# EAGLE board Schematics_backup (EAGLE 9.2.2)
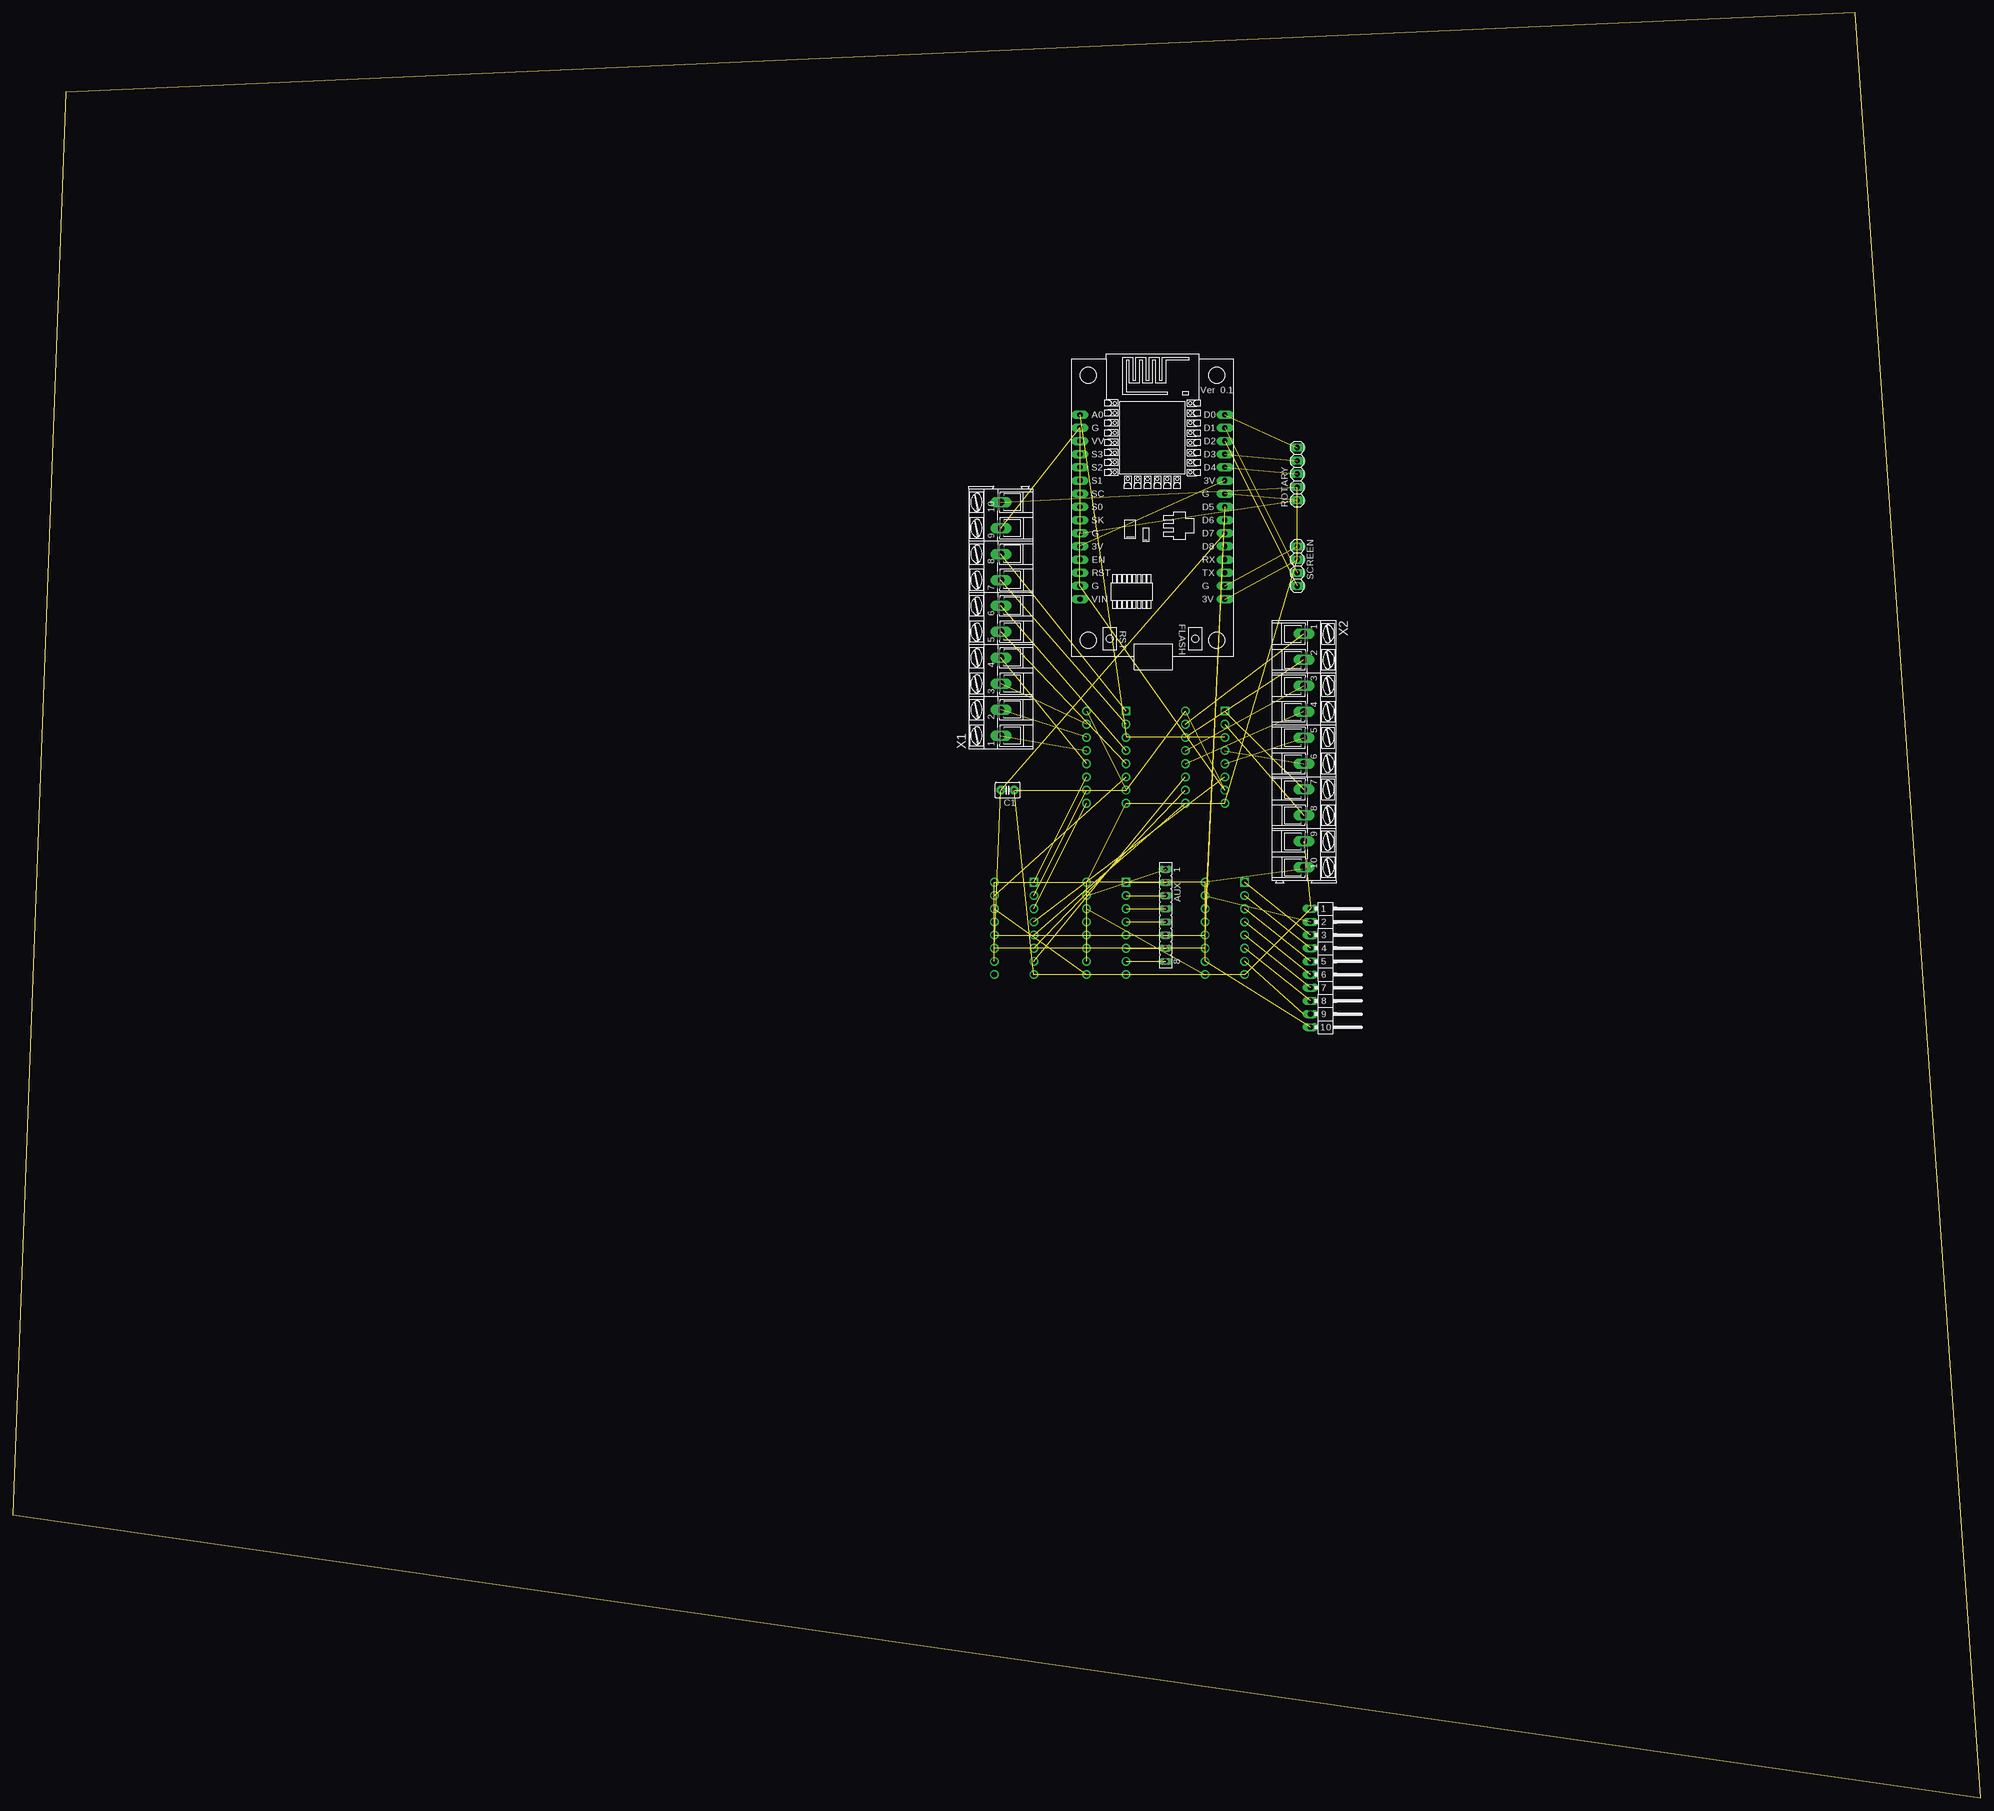
[diagram p0: board, top side]
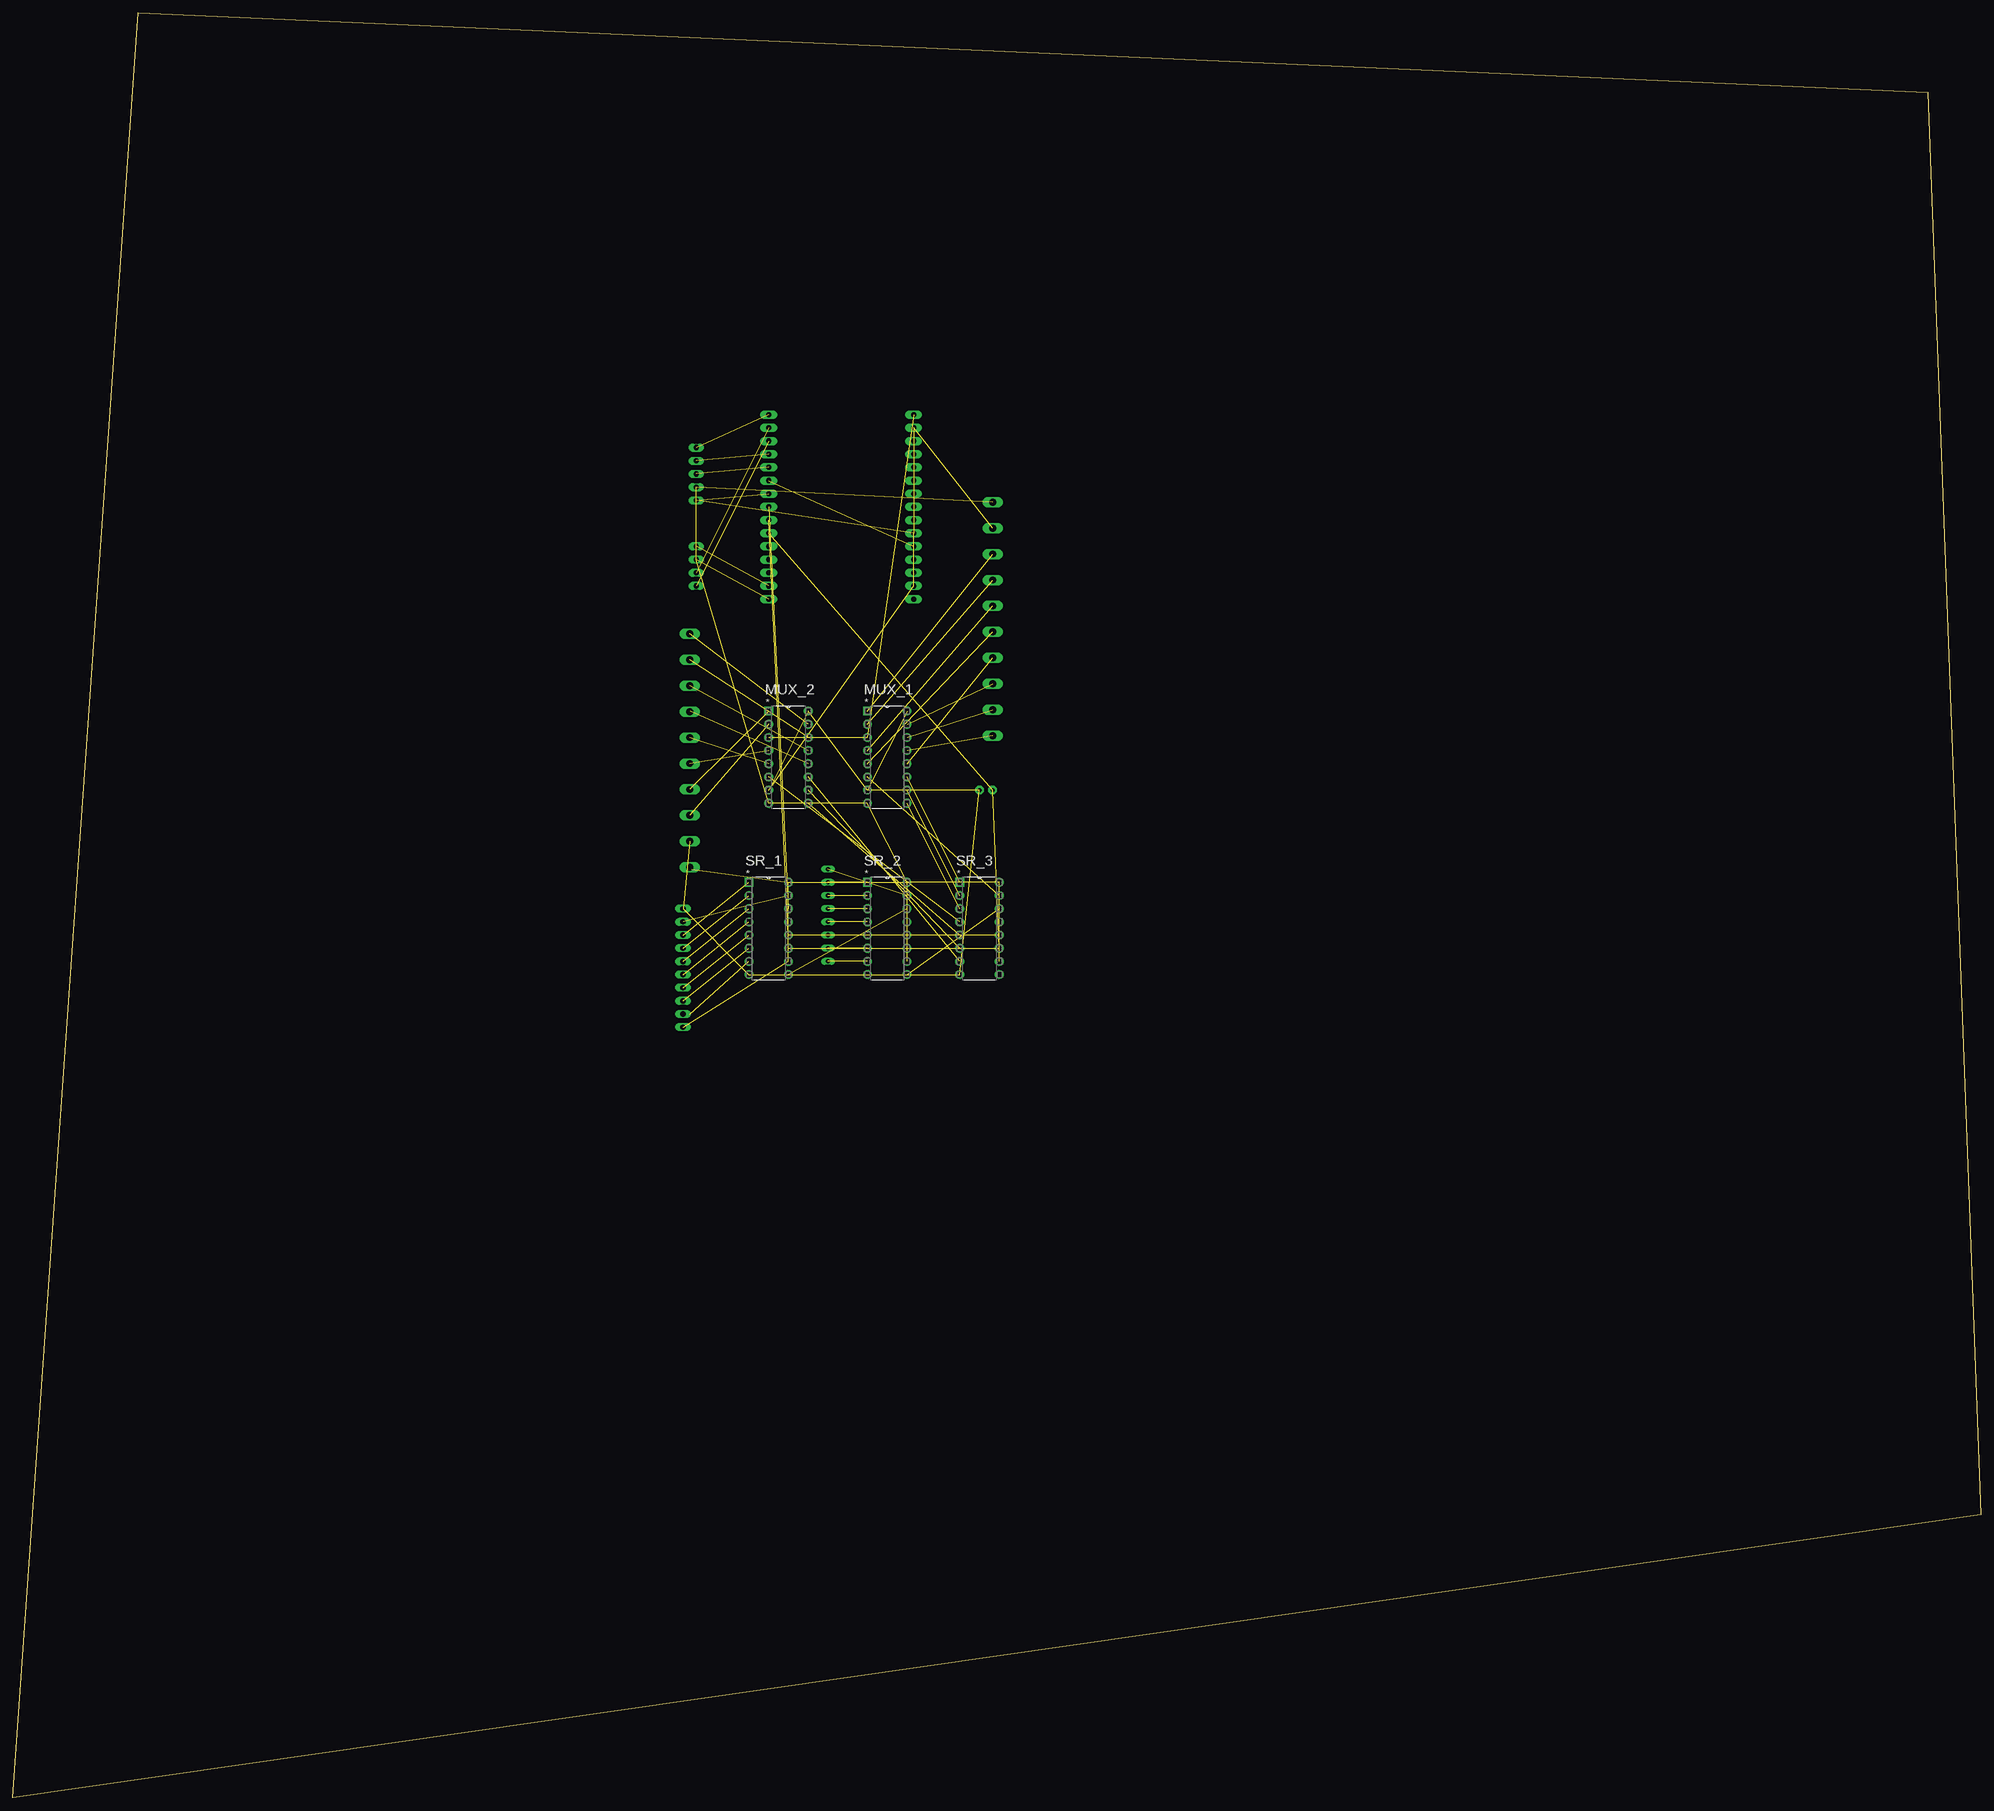
[diagram p1: board, bottom side, seen from below]

Size 379.4 x 344.16 mm. Coordinates in mm from the lower left corner, seen from the top.
Outline: 0,54.61 379.4,0 355.27,344.16 10.16,328.92 0,54.61
Copper layers (1*16): Top 0.035mm / dielectric 1.5mm / Bottom 0.035mm
Design rules "default": minimum track width 6mil, minimum drill 0.35mm, track to track 6mil, track to pad 6mil, pad to pad 6mil, via to via 6mil, smd to smd 6mil, copper to edge 40mil, drill to drill 6mil, minimum pad ring 10mil, minimum via ring 8mil, stop-mask expansion 4mil, vias tented up to drill 0mil, thermal gap 10mil

## Footprints (pad centres in the part's own frame; a part is rotated, then mirrored left to right if it is on the bottom)
FE08 = drill 0.813 long: 1 -8.89,0; 2 -6.35,0; 3 -3.81,0; 4 -1.27,0; 5 1.27,0; 6 3.81,0; 7 6.35,0; 8 8.89,0
C2.5-3 = drill 0.813 pad 1.6 octagon: 1 -1.27,0; 2 1.27,0
DIP254P762X508-16 = drill 1.118 square: 1 -7.62,17.78 | drill 1.118: 2 -7.62,15.24; 3 -7.62,12.7; 4 -7.62,10.16; 5 -7.62,7.62; 6 -7.62,5.08; 7 -7.62,2.54; 8 -7.62,0; 9 0,0; 10 0,2.54; 11 0,5.08; 12 0,7.62; 13 0,10.16; 14 0,12.7; 15 0,15.24; 16 0,17.78
MA10-1W = drill 1.016 long: 1 -11.43,0; 2 -8.89,0; 3 -6.35,0; 4 -3.81,0; 5 -1.27,0; 6 1.27,0; 7 3.81,0; 8 6.35,0; 9 8.89,0; 10 11.43,0
1X05 = drill 1.016 long: 1 -5.08,0; 2 -2.54,0; 3 0,0; 4 2.54,0; 5 5.08,0
1X04 = drill 1.016 long: 1 -3.81,0; 2 -1.27,0; 3 1.27,0; 4 3.81,0
NODEMCU = drill 1 pad 1.676 long: 1 -13.97,17.78; 2 -13.97,15.24; 3 -13.97,12.7; 4 -13.97,10.16; 5 -13.97,7.62; 6 -13.97,5.08; 7 -13.97,2.54; 8 -13.97,0; 9 -13.97,-2.54; 10 -13.97,-5.08; 11 -13.97,-7.62; 12 -13.97,-10.16; 13 -13.97,-12.7; 14 -13.97,-15.24; 15 -13.97,-17.78; 16 13.97,-17.78; 17 13.97,-15.24; 18 13.97,-12.7; 19 13.97,-10.16; 20 13.97,-7.62; 21 13.97,-5.08; 22 13.97,-2.54; 23 13.97,0; 24 13.97,2.54; 25 13.97,5.08; 26 13.97,7.62; 27 13.97,10.16; 28 13.97,12.7; 29 13.97,15.24; 30 13.97,17.78
AK300/10 = drill 1.321 long: 1 -22.504,0; 2 -17.501,0; 3 -12.497,0; 4 -7.493,0; 5 -2.515,0; 6 2.489,0; 7 7.493,0; 8 12.497,0; 9 17.501,0; 10 22.504,0

## Placement (x,y rotation side)
AUX  [FE08]  222.25,170.18 270 top
C1  10µF  [C2.5-3]  191.77,194.31 180 top
MUX_1  CD4051BE  [DIP254P762X508-16]  207.01,191.77 0 bottom
MUX_2  CD4051BE  [DIP254P762X508-16]  226.06,191.77 0 bottom
RELAYS  [MA10-1W]  250.19,160.02 270 top
ROTARY  [1X05]  247.65,255.27 90 top
SCREEN  [1X04]  247.65,237.49 270 top
SR_1  SN74HC595N  [DIP254P762X508-16]  229.87,158.75 0 bottom
SR_2  SN74HC595N  [DIP254P762X508-16]  207.01,158.75 0 bottom
SR_3  SN74HC595N  [DIP254P762X508-16]  189.23,158.75 0 bottom
U$1  NODEMCU  [NODEMCU]  219.71,248.92 0 top
X1  Boutons  [AK300/10]  190.5,227.33 90 top
X2  Potentiometres  [AK300/10]  248.92,201.93 270 top

## Library data of the parts
AUX = con-lsta; OC_FARNELL: unknown; OC_NEWARK: unknown
C1 = capacitor-wima
MUX_1 MUX_2 = CD4051BEE4; MPN: CD4051BE; OC_FARNELL: 2135100; OC_NEWARK: 60K5119; PACKAGE: PDIP-16; SUPPLIER: Texas Instruments
RELAYS = con-lstb; OC_FARNELL: unknown; OC_NEWARK: unknown
ROTARY SCREEN = pinhead
SR_1-SR_3 = 74hc595; MPN: SN74HC595N; OC_FARNELL: 9591664; OC_NEWARK: 60K6845; PACKAGE: PDIP-16; SUPPLIER: Texas Instruments
U$1 = nodemcu
X1 X2 = con-ptr500; OC_FARNELL: unknown; OC_NEWARK: unknown

## Nets
3V: U$1.11 U$1.25
GND: C1.1 MUX_1.7 MUX_1.16 MUX_2.7 MUX_2.16 RELAYS.1 ROTARY.1 SCREEN.1 SR_1.8 SR_2.8 SR_3.8 U$1.2 U$1.10 U$1.14 U$1.17 U$1.24 X1.9 X2.9
N$1: RELAYS.2 SR_1.15
N$2: SR_1.14 U$1.23
N$3: SR_1.12 SR_2.12 SR_3.12 U$1.22
N$4: SR_2.9 SR_3.14
N$5: C1.2 SR_1.11 SR_2.11 SR_3.11 U$1.21
N$6: RELAYS.3 SR_1.1
N$7: RELAYS.4 SR_1.2
N$8: RELAYS.5 SR_1.3
N$9: RELAYS.6 SR_1.4
N$10: RELAYS.7 SR_1.5
N$11: RELAYS.8 SR_1.6
N$12: RELAYS.9 SR_1.7
N$13: MUX_1.13 X1.1
N$14: MUX_1.14 X1.2
N$15: SR_1.9 SR_2.14
N$16: MUX_1.15 X1.3
N$17: MUX_1.12 X1.4
N$18: MUX_1.1 X1.8
N$19: MUX_1.5 X1.5
N$20: MUX_1.2 X1.7
N$21: MUX_1.4 X1.6
N$22: MUX_2.1 X2.7
N$23: MUX_2.2 X2.8
N$24: MUX_1.6 SR_3.15
N$25: MUX_1.11 SR_3.1
N$26: MUX_1.10 SR_3.2
N$27: MUX_1.9 SR_3.3
N$28: MUX_2.6 SR_3.4
N$29: MUX_2.9 SR_3.5
N$30: MUX_2.10 SR_3.6
N$31: MUX_2.11 SR_3.7
N$32: MUX_1.3 MUX_2.3 U$1.1
N$33: MUX_2.4 X2.6
N$34: MUX_2.5 X2.5
N$35: MUX_2.12 X2.4
N$36: MUX_2.15 X2.1
N$37: MUX_2.14 X2.2
N$38: MUX_2.13 X2.3
N$39: AUX.1 SR_2.15
N$40: AUX.2 SR_2.1
N$41: AUX.3 SR_2.2
N$42: AUX.4 SR_2.3
N$43: AUX.5 SR_2.4
N$44: AUX.6 SR_2.5
N$45: AUX.7 SR_2.6
N$46: AUX.8 SR_2.7
N$48: ROTARY.3 U$1.26
N$49: ROTARY.5 U$1.30
N$50: ROTARY.4 U$1.27
N$51: SCREEN.4 U$1.28
N$52: SCREEN.3 U$1.29
VCC: MUX_1.8 MUX_2.8 RELAYS.10 ROTARY.2 SCREEN.2 SR_1.10 SR_1.16 SR_2.10 SR_2.16 SR_3.10 SR_3.16 U$1.16 X1.10 X2.10

## Tracks (layer width: path | path; a pad name or v marks a point on that pad's centre or on a via)
3V  (1 unrouted)
GND  (17 unrouted)
  Bottom 0.152: RELAYS.1 251.46,171.45
N$1  (1 unrouted)
N$2  (1 unrouted)
N$3  (3 unrouted)
N$4  (1 unrouted)
N$5  (4 unrouted)
N$6  (1 unrouted)
N$7  (1 unrouted)
N$8  (1 unrouted)
N$9  (1 unrouted)
N$10  (1 unrouted)
N$11  (1 unrouted)
N$12  (1 unrouted)
  Top 0.152: RELAYS.9 248.92,151.13
N$13  (1 unrouted)
N$14  (1 unrouted)
N$15  (1 unrouted)
N$16  (1 unrouted)
N$17  (1 unrouted)
N$18  (1 unrouted)
N$19  (1 unrouted)
N$20  (1 unrouted)
N$21  (1 unrouted)
N$22  (1 unrouted)
N$23  (1 unrouted)
N$24  (1 unrouted)
N$25  (1 unrouted)
N$26  (1 unrouted)
N$27  (1 unrouted)
N$28  (1 unrouted)
N$29  (1 unrouted)
N$30  (1 unrouted)
N$31  (1 unrouted)
N$32  (2 unrouted)
N$33  (1 unrouted)
N$34  (1 unrouted)
N$35  (1 unrouted)
  Top 0.152: 248.79,209.55 X2.4
N$36  (1 unrouted)
N$37  (1 unrouted)
N$38  (1 unrouted)
N$39  (1 unrouted)
N$40  (1 unrouted)
N$41  (1 unrouted)
N$42  (1 unrouted)
N$43  (1 unrouted)
N$44  (1 unrouted)
N$45  (1 unrouted)
N$46  (1 unrouted)
N$48  (1 unrouted)
N$49  (1 unrouted)
N$50  (1 unrouted)
N$51  (1 unrouted)
N$52  (1 unrouted)
VCC  (13 unrouted)
  Top 0.152: 248.56,179.07 X2.10